# Altium PCB 把手锁主板20429.PcbDoc (part 2 of 2)
Units mil, origin at the board's own origin, x right, y up, seen from the top; angles counter-clockwise.
Board outline 5950 x 1025 mil, 2 copper layers (Top Layer, Bottom Layer); 74 components, 56 nets, 241 pads, 365 vias.
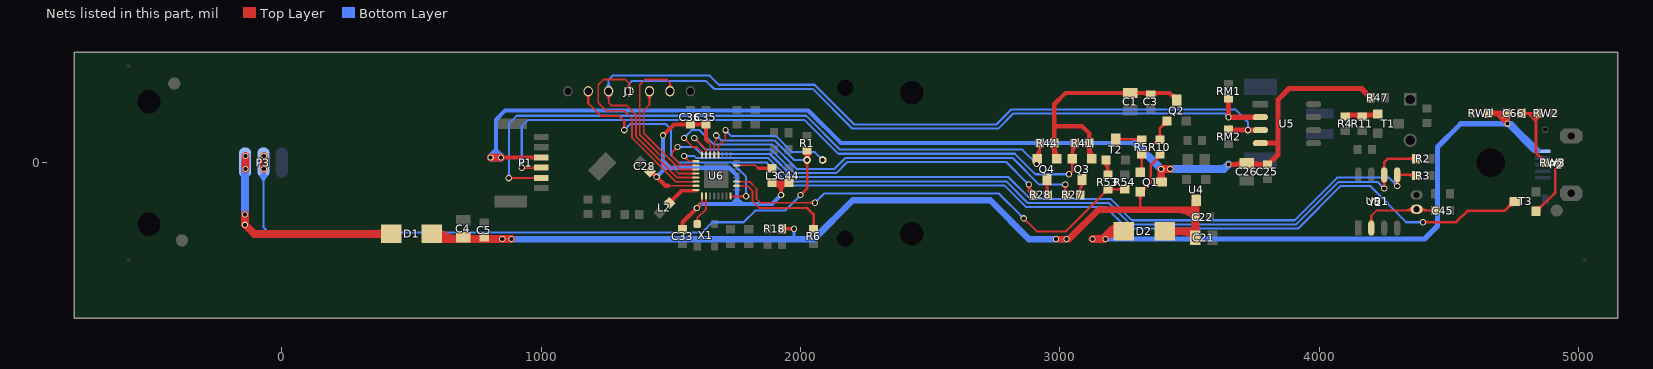
[diagram p2: the nets of this part, all layers, seen from the top]

## Via types
v1: diameter 24, hole 16, Top Layer to Bottom Layer, tented both sides, 363 vias
v2: diameter 20, hole 10, Top Layer to Bottom Layer, tented both sides, 2 vias

## Nets (pads, with @x,y where several pads share a name; then routed paths per layer and width w, separated by ;. In a path a pad name is that pad's centre, name@x,y a point inside that pad or via, vN(x,y) a via of type N, cw(c..) or ccw(c..) an arc to the next point about the centre after c; other vN are vias at no path point) (continued)
NetC45_2: C45.2 UB1.2 Y2.2 | length 528.7
  Top Layer w8: UB1.2@4194.48,-229.12 ccw(c4181.14,-215.79) 4200,-215.79 ccw(c4218.86,-215.79) UB1.2@4205.52,-229.12 ; UB1.2@4200,-252.36 4200,-205 4220,-185 C45.2@4447,-185 ; 4324.2,-185 ccw(c4324.2,-135.22) Y2.2@4359.4,-170.42 ; 4343.51,-185 ccw(c4343.51,-154.54) Y2.2@4365.05,-176.08 ; 4347.76,-185 cw(c4347.76,-201.45) Y2.2@4359.4,-189.82 ; Y2.2@4384.95,-176.08 ccw(c4406.49,-154.54) 4406.49,-185 ; Y2.2@4390.6,-189.82 cw(c4402.24,-201.45) 4402.24,-185 ; Y2.2@4390.6,-170.42 ccw(c4425.8,-135.22) 4425.8,-185 ; C45.2@4438.69,-193.31 ccw(c4418.64,-213.36) 4418.64,-185 ccw(c4418.64,-156.64) C45.2@4438.69,-176.69
NetC49_1: 
NetC66_2: C66.2 RW2.2 RW3.2 | length 490.4
  Top Layer w10: C66.2@4778,190 4803.95,190 ; C66.2@4785.6,182.4 cw(c4803.95,164.05) 4803.95,190 ; C66.2@4785.6,197.6 ccw(c4803.95,215.95) 4803.95,190 ; 4835,156.57 cw(c4857.38,156.57) RW2.2@4850.37,177.82 ; 4835,170.4 cw(c4852.82,170.4) RW2.2@4847.23,187.32 ; RW2.2@4835,189.52 4835,158.95 ; RW2.2@4839.4,182.4 ccw(c4821.05,164.05) 4821.05,190 ccw(c4821.05,215.95) RW2.2@4839.4,197.6 ; RW2.2@4847,190 4803.95,190 ; 4850.29,21.71 ccw(c4872,43.42) RW3.2@4872,12.72 ; 4855.04,16.96 cw(c4840.06,1.97) RW3.2@4861.25,1.97 ; RW3.2@4872,0 4835,37 4835,158.95 ; 4803.95,190 4835,158.95
NetD1_1: D1.1 P3.3 | length 1066.7
  Top Layer w30: v1(-141.73,-200) v1(-141.73,-240) -106.73,-275 ; v1(-140,-25) v1(-140,25) ; -25,-275 -106.73,-275 ; D1.1@402.87,-289.45 ccw(c367.99,-324.33) 367.99,-275 ccw(c367.99,-225.67) D1.1@402.87,-260.55 ; D1.1@421.26,-275 -106.73,-275
  Bottom Layer w30: v1(-141.73,-240) v1(-141.73,-200) P3.3@-141.73,0
NetL2_2: L2.2 U6.32 | length 156.7
  Top Layer w14: L2.2@1494.8,-155.2 1540.7,-109.3 1599.3,-109.3 ; L2.2@1494.8,-146.45 ccw(c1494.8,-125.33) 1509.73,-140.27 ccw(c1524.67,-155.2) L2.2@1503.55,-155.2
NetL3_2: L3.2 U6.15 | length 177.9
  Top Layer w7: U6.15@1753.74,-10.63 1825,-10.63 1836.37,-22
  Top Layer w12: 1836.37,-22 L3.2@1890,-22 ; L3.2@1881.14,-28.89 ccw(c1864.5,-45.53) 1864.5,-22 ccw(c1864.5,1.53) L3.2@1881.14,-15.11
NetQ1_G: Q1.G Q2.G R5.1 R10.2 | length 527.8
  Top Layer w8: Q1.G@3310,-37.6 3315,-32.6 Q1.G@3322,-25.6 ; R5.1@3315,18 3322,25 3322,32 R5.1@3322,37
  Top Layer w10: R5.1@3307.38,22.62 cw(c3288.98,4.22) 3315,4.22 ; Q1.G@3307.42,-28.29 ccw(c3289.13,-10) 3315,-10 ; Q1.G@3307.88,-35.48 ccw(c3290.69,-18.28) 3315,-18.28 ccw(c3329.31,-18.28) Q1.G@3319.19,-28.41 ; Q1.G@3315,-32.6 R5.1@3315,18 ; 3315,-9.89 ccw(c3341.02,-9.89) Q1.G@3322.62,-28.29 ; R5.1@3315,32 3322,32 3378,88 R10.2@3385,88 ; R5.1@3316.65,37.4 ccw(c3316.65,63.35) 3335,45 ccw(c3353.35,26.65) R5.1@3327.4,26.65 ; R5.1@3322.53,22.5 ccw(c3340.71,4.33) 3315,4.33 cw(c3340.87,4.33) R5.1@3322.58,22.62 ; 3365,75 cw(c3374.76,65.24) R10.2@3374.76,79.04 ; R10.2@3377.42,97.91 ccw(c3359.13,116.2) 3385,116.2 ; R10.2@3385,100 3385,132.4 Q2.G@3412.6,160 ; 3385,116.31 ccw(c3411.02,116.31) R10.2@3392.62,97.91 ; Q2.G@3399.6,160 cw(c3368.21,160) 3390.41,137.81 cw(c3412.6,115.62) Q2.G@3412.6,147
NetR4_1: R4.1 R11.1 T1.1 | length 726.8
  Top Layer w10: R4.1@4102.5,177.47 cw(c4126.47,153.5) 4126.47,187.4 ; R4.1@4109.57,185.6 ccw(c4127.92,203.95) 4127.92,178 ccw(c4127.92,152.05) 4109.57,170.4 cw(c4150.61,129.35) R11.1@4150.61,187.4 ; R4.1@4114.39,187.4 cw(c4114.39,129.35) 4155.43,170.4 ccw(c4137.08,152.05) 4137.08,178 ccw(c4137.08,203.95) R11.1@4155.43,185.6 ; 4138.53,187.4 cw(c4138.53,153.5) R11.1@4162.5,177.47 ; R11.1@4167.5,177.47 cw(c4191.47,153.5) 4191.47,187.4 ; R11.1@4170.92,178 ccw(c4170.92,241.49) 4215.81,196.59 cw(c4193.62,218.79) 4193.62,187.4 cw(c4193.62,156.02) T1.1@4215.81,178.21 ; R11.1@4174.57,185.6 ccw(c4192.92,203.95) 4192.92,178 ccw(c4192.92,152.05) 4174.57,170.4 cw(c4215.61,129.35) T1.1@4215.61,187.4 ; 4195.06,178 ccw(c4195.06,217.34) T1.1@4222.88,189.52 ; R4.1@4100,178 4109.4,187.4 T1.1@4225,187.4 4215.6,178 R11.1@4165,178 R4.1@4100,178
NetR5_2: R5.2 T2.3 | length 245.4
  Top Layer w8: T2.3@3215,90 R5.2@3322,90 ; T2.3@3224.9,80.1 cw(c3248.8,56.2) 3248.8,90 cw(c3248.8,123.8) T2.3@3224.9,99.9 ; 3284.89,90 ccw(c3284.89,116.02) R5.2@3303.29,97.62 ; 3285,90 cw(c3285,64.13) R5.2@3303.29,82.42 ; R5.2@3313.69,81.69 ccw(c3293.64,61.64) 3293.64,90 ccw(c3293.64,118.36) R5.2@3313.69,98.31
NetR27_2: R27.2 U6.24 | length 1917.6
  Top Layer w7: v1@1550,86.5 cw(c1550,65.98) 1564.51,80.49 cw(c1579.02,95) v1@1558.5,95 ; v1(1550,95) 1585,60 1600,60 1619.88,40.12 U6.24@1619.88,28.74
  Top Layer w8: R27.2@3013.69,-114.72 ccw(c2998.47,-99.5) 3020,-99.5 ; v1@3014.34,-90.66 cw(c3000.69,-104.31) 3020,-104.31 cw(c3039.31,-104.31) v1@3025.66,-90.66 ; v1@3020,-89.84 ccw(c3055.19,-89.84) R27.2@3030.31,-114.72 ; v1(3020,-85) 3020,-123 R27.2@3022,-125
  Bottom Layer w8: v1(1550,95) 1580,125 1610,125 1665,70 1890,70 1984.63,-24.63 2130.37,-24.63 2173.25,18.25 2816.75,18.25 2920,-85 v1(3020,-85) ; v1@1550,103 ccw(c1550,122.31) 1563.66,108.66 ccw(c1577.31,95) v1@1558,95 ; v1@3014.34,-90.66 ccw(c3000.69,-104.31) 3000.69,-85 ccw(c3000.69,-65.69) v1@3014.34,-79.34
NetR28_2: R28.2 U6.23 | length 1749.2
  Top Layer w7: v1@1590,86.5 cw(c1590,65.98) 1604.51,80.49 cw(c1619.02,95) v1@1598.5,95 ; v1(1590,95) 1635.63,49.37 U6.23@1635.63,28.74
  Top Layer w10: v1@2875.05,-89.95 cw(c2863.1,-101.9) 2880,-101.9 cw(c2896.9,-101.9) v1@2884.95,-89.95 ; 2880,-98.71 ccw(c2904.8,-98.71) R28.2@2897.23,-122.32 ; R28.2@2886.26,-122.56 ccw(c2868.2,-121.77) 2880.98,-108.98 ccw(c2890.84,-99.13) R28.2@2894.32,-112.62 ; R28.2@2897,-125 2880,-108 v1(2880,-85) ccw(c2909.19,-85) R28.2@2900.28,-112.8
  Bottom Layer w8: v1@1590,87 cw(c1590,67.69) 1603.66,81.34 cw(c1617.31,95) v1@1598,95 ; v1(1590,95) 1635,50 1887.55,50 1978.05,-40.5 2136.95,-40.5 2179.83,2.38 2792.62,2.38 v1(2880,-85) ; v1@2872,-85 ccw(c2852.69,-85) 2866.34,-71.34 ccw(c2880,-57.69) v1@2880,-77
NetR53_2: R53.2 T2.1 | length 170.9
  Top Layer w10: T2.1@3168.41,0.81 cw(c3128.34,-39.25) R53.2@3185,-39.25 ; T2.1@3175.48,7.88 cw(c3152.49,-15.11) 3185,-15.11 ; R53.2@3177.4,-39.4 ccw(c3159.05,-21.05) 3185,-21.05 ccw(c3210.95,-21.05) R53.2@3192.6,-39.4 ; T2.1@3177.6,10 3185,2.6 R53.2@3185,-47
NetRW3_1: RW3.1 T3.1 | length 307.1
  Top Layer w10: T3.1@4835,-187.4 4837.6,-187.4 4910,-115 4910,-25 4928,-7 RW3.1@4928,0 ; T3.1@4835,-174.4 ccw(c4835,-136.75) 4861.63,-163.37 ; T3.1@4848,-187.4 cw(c4873.11,-187.4) 4855.36,-169.64 ; 4912.52,-22.48 ccw(c4899.05,-9.01) RW3.1@4917.56,-4.51 ; RW3.1@4918.24,-16.76 cw(c4928,-26.52) RW3.1@4928,-12.72
NetU6_2: U6.2 X1.1 | length 158.3
  Top Layer w6: X1.1@1595.47,-237.6 X1.1@1595.47,-231.69
  Top Layer w7: X1.1@1595.15,-226.67 ccw(c1584.69,-213.47) 1601.54,-213.47 ; X1.1@1601.54,-236.69 1601.54,-213.46 ; X1.1@1607.92,-226.67 cw(c1618.38,-213.47) 1601.54,-213.47 ; U6.2@1635.63,-128.74 1635.63,-179.37 1601.54,-213.46
P04/LED_RED: J1.3 U6.27 | length 484.2
  Top Layer w7: J1.3@1407.47,262.98 cw(c1383.2,238.71) 1417.52,238.71 cw(c1451.84,238.71) J1.3@1427.57,262.98 ; J1.3@1417.52,275 1417.52,222.52 1395,200 1395,113.1 1534.48,-26.38 U6.27@1596.26,-26.38
P05/LED_GREEN: J1.2 U6.28 | length 681.7
  Top Layer w7: J1.2@1486.79,287.57 ccw(c1467.87,308.74) 1496.26,308.74 ; J1.2@1496.26,275 1496.26,308.74 ; J1.2@1505.73,287.57 cw(c1524.65,308.74) 1496.26,308.74 ; U6.28@1596.26,-42.13 1529.2,-42.13 1380,107.07 1380,300 1400,320 1485,320 1496.26,308.74
P06/MOTO1: J1.5 RM2.2 U5.3 U6.29 | length 3493.5
  Top Layer w7: J1.5@1249.99,262.98 cw(c1225.72,238.71) 1260.04,238.71 cw(c1294.36,238.71) J1.5@1270.09,262.98 ; J1.5@1260.04,275 1260.04,229.96 1270,220 1330,220 1365,185 1365,101.03 1523.91,-57.87 U6.29@1596.26,-57.87
  Top Layer w20: RM2.2@3653,125 v1(3725,125) U5.3@3772.64,125 ; RM2.2@3656.03,132.06 ccw(c3673.09,149.12) 3673.09,125
  Bottom Layer w8: J1.5@1250.34,286.67 ccw(c1226.92,310.08) 1260.04,310.08 ccw(c1293.15,310.08) J1.5@1269.74,286.67 ; J1.5@1260.04,275 1260.04,320.04 1275,335 1650,335 1685,300 2053.56,300 2206.81,146.75 2754.68,146.75 2812.93,205 3675,205 3725,155 v1(3725,125) ; v1@3719.34,130.66 ccw(c3705.69,144.31) 3725,144.31 ccw(c3744.31,144.31) v1@3730.66,130.66
P07/MOTO0: J1.4 RM1.2 U5.2 U6.30 | length 3534
  Top Layer w7: J1.4@1330,288.15 ccw(c1315.8,306.22) 1338.78,306.22 ccw(c1361.76,306.22) J1.4@1347.56,288.15 ; J1.4@1338.78,275 1338.78,306.22 1325,320 1240,320 1220,300 1220,230 1250,200 1320,200 1350,170 1350,95 1518.62,-73.62 U6.30@1596.26,-73.62
  Top Layer w20: RM1.2@3650,247 v1(3650,175) U5.2@3772.64,175
  Bottom Layer w8: J1.4@1330.75,288.09 ccw(c1319.44,303.78) 1338.78,303.78 ; J1.4@1338.78,275 1338.78,303.78 ; J1.4@1346.8,288.09 cw(c1358.12,303.78) 1338.78,303.78 ; v1@3642,175 ccw(c3622.69,175) 3636.34,188.66 ccw(c3650,202.31) v1@3650,183 ; v1(3650,175) 3635.87,189.13 2819.51,189.13 2761.26,130.87 2200.23,130.87 2047.11,284 1666,284 1635,315 1350,315 1338.78,303.78
PWR_CTL: R53.1 R54.2 U6.11 | length 1952
  Top Layer w7: U6.11@1753.74,-73.62 1803.62,-73.62 1830,-100 1830,-140 1845,-155 v1(2055,-155) ; v1@2048.99,-161.01 ccw(c2034.48,-175.52) 2034.48,-155 ccw(c2034.48,-134.48) v1@2048.99,-148.99
  Top Layer w8: v1@2859.34,-222.34 cw(c2859.34,-241.66) 2873,-228 cw(c2886.66,-214.34) v1@2867.34,-214.34 ; v1(2860,-215) 2910,-265 3023,-265 R53.1@3185,-103 R54.2@3250,-103 ; 3161.58,-126.42 ccw(c3138.17,-103) R53.1@3171.28,-103 ; 3166.34,-121.66 cw(c3183.03,-138.36) R53.1@3183.03,-114.75 ; R53.1@3195.28,-111.31 cw(c3215.33,-131.36) 3215.33,-103 cw(c3215.33,-74.64) R53.1@3195.28,-94.69 ; R54.2@3239.72,-111.31 ccw(c3219.67,-131.36) 3219.67,-103 ccw(c3219.67,-74.64) R54.2@3239.72,-94.69
  Bottom Layer w8: v1(2055,-155) 2090,-120 2765,-120 v1(2860,-215) ; v1@2055,-147 ccw(c2055,-127.69) 2068.66,-141.34 ccw(c2082.31,-155) v1@2063,-155 ; v1@2852,-215 ccw(c2832.69,-215) 2846.34,-201.34 ccw(c2860,-187.69) v1@2860,-207
REMOTO: R6.2 U6.10 | length 463.3
  Top Layer w7: U6.10@1753.74,-89.37 1794.37,-89.37 1815,-110 1815,-150 1840,-175 2025,-175
  Top Layer w10: 2025,-175 2050,-200 R6.2@2050,-257 ; R6.2@2042.4,-249.4 ccw(c2024.05,-231.05) 2050,-231.05 ccw(c2075.95,-231.05) R6.2@2057.6,-249.4
RSTN: J1.6 T3.3 U6.8 | length 4648.1
  Top Layer w8: J1.6@1171.6,263.33 cw(c1148.18,239.92) 1181.3,239.92 cw(c1214.41,239.92) J1.6@1191,263.33 ; J1.6@1181.3,275 1181.3,228.7 1230,180 1300,180 1320,160 v1(1320,125) ; v1@1314.34,130.66 ccw(c1300.69,144.31) 1320,144.31 ccw(c1339.31,144.31) v1@1325.66,130.66 ; U6.8@1730.18,-128.74 1731.44,-130 v1(1790,-130) ; v1@1784.34,-135.66 ccw(c1770.69,-149.31) 1770.69,-130 ccw(c1770.69,-110.69) v1@1784.34,-124.34
  Top Layer w10: v1(4400,-230) 4527.44,-230 4572.44,-185 4715,-185 4750,-150 T3.3@4755,-150 ; v1@4404.95,-234.95 cw(c4416.9,-246.9) 4416.9,-230 cw(c4416.9,-213.1) v1@4404.95,-225.05 ; 4726.86,-173.14 cw(c4751.35,-197.64) T3.3@4751.35,-163 ; 4730.11,-169.89 ccw(c4710.21,-150) T3.3@4738.35,-150
  Bottom Layer w8: v1(1320,125) 1343.87,148.87 1480,148.87 1500,128.87 1500,30 1530,0 1735,0 ; v1@1320,133 ccw(c1320,152.31) 1333.66,138.66 ccw(c1347.31,125) v1@1328,125 ; v1@1784.34,-124.34 ccw(c1770.69,-110.69) 1790,-110.69 ccw(c1809.31,-110.69) v1@1795.66,-124.34 ; v1(1790,-130) 1790,-88 ; 1790.13,-88.13 1790,-88 ; 1811,0 1800,0 ; 2000,-88.13 1958.13,-88.13 ; v1@4394.34,-235.66 ccw(c4380.69,-249.31) 4380.69,-230 ccw(c4380.69,-210.69) v1@4394.34,-224.34 ; v1(4400,-230) 4335,-230 4195,-90 4082.55,-90 3918.42,-254.13 3259.13,-254.13 3177,-172 2869.45,-172 2785.58,-88.13 1958.13,-88.13 ; 1735,0 1745,-10 ; 1735,0 1745,0 ; 1745,-10 1750,-15 ; 1745,-10 1745,0 ; 1745,0 1750,0 ; 1750,-15 1790,-55 1790,-88 ; 1750,-15 1750,0 ; 1750,0 1800,0 ; 1800,0 1870,0 1958.13,-88.13
RX2/SETKEY: P3.2 pad.2@2025,10 R1.1 U6.21 | length 3621.3
  Top Layer w6: U6.21@1667.13,28.74 1667.13,77.13 1675,85 ; v1@1669.03,98.26 cw(c1657.28,85) 1675,85 ; v1(1675,105) 1675,85 ; v1@1680.97,98.26 ccw(c1692.72,85) 1675,85
  Top Layer w10: v1(2000,-125) 2025,-100 pad.2@2025,10 ; v1@2000,-118 ccw(c2000,-101.1) 2011.95,-113.05 ccw(c2023.9,-125) v1@2007,-125 ; R1.1@2013,35 pad.2@2025,23 ; R1.1@2017.84,38.98 cw(c2003.58,23) pad.2@2025,23 ; pad.2@2017.93,2.93 cw(c2000.86,-14.14) 2025,-14.14 cw(c2049.14,-14.14) pad.2@2032.07,2.93 ; pad.2@2017.93,17.07 ccw(c2000.86,34.14) 2025,34.14 ccw(c2049.14,34.14) pad.2@2032.07,17.07 ; 2019.53,28.47 cw(c2005.25,14.2) pad.2@2025,10 ; R1.1@2025,47 pad.2@2025,23 ; 2027.36,25.36 ccw(c2036.65,16.07) pad.2@2025,10 ; R1.1@2032.16,38.98 ccw(c2046.42,23) pad.2@2025,23 ; pad.2@2033.87,14.62 cw(c2049.32,22.68) 2037,35 pad.2@2025,23 ; pad.2@2025,10 pad.2@2025,23
  Top Layer w30: v1(-70,-25) v1(-70,25)
  Bottom Layer w8: P3.2@-84.74,-49.31 cw(c-118.24,-82.8) -70.87,-82.8 cw(c-23.49,-82.8) P3.2@-56.99,-49.31 ; P3.2@-79.08,-43.65 cw(c-98.92,-63.49) -70.87,-63.49 cw(c-42.81,-63.49) P3.2@-62.65,-43.65 ; P3.2@-75.66,-30.66 cw(c-87.22,-42.22) P3.2@-70.87,-42.22 ; P3.2@-75.66,-19.34 ccw(c-87.22,-7.78) P3.2@-70.87,-7.78 ; P3.2@-70.87,-46.4 cw(c-48.6,-46.4) P3.2@-64.34,-30.66 ; P3.2@-70.87,-3.6 ccw(c-48.6,-3.6) P3.2@-64.34,-19.34 ; P3.2@-70.87,0 -70.87,-249.13 -50,-270 1620,-270 1660,-230 1780,-230 1825,-185 1940,-185 v1(2000,-125) ; v1@1675,97 cw(c1675,77.69) 1688.66,91.34 cw(c1702.31,105) v1@1683,105 ; v1(1675,105) 1694.13,85.87 1899.13,85.87 1975,10 pad.2@2025,10 ; v1@1992,-125 cw(c1972.69,-125) 1986.34,-138.66 cw(c2000,-152.31) v1@2000,-133 ; pad.2@2019.34,4.34 ccw(c2005.69,-9.31) 2005.69,10 ccw(c2005.69,29.31) pad.2@2019.34,15.66
SCL: R2.2 U6.25 UB1.6 | length 3384.2
  Top Layer w6: v1@1550,16 cw(c1550,-5.73) 1565.36,9.64 cw(c1580.73,25) v1@1559,25 ; v1(1550,25) 1569.88,5.12 U6.25@1596.26,5.12
  Top Layer w10: v1@4245.05,-95.05 ccw(c4233.1,-83.1) 4250,-83.1 ccw(c4266.9,-83.1) v1@4254.95,-95.05 ; UB1.6@4245.18,-70.17 cw(c4233.56,-81.8) 4250,-81.8 cw(c4266.44,-81.8) UB1.6@4254.82,-70.17 ; UB1.6@4245.18,-25.11 ccw(c4233.56,-13.48) 4250,-13.48 ccw(c4266.44,-13.48) UB1.6@4254.82,-25.11 ; v1(4250,-100) UB1.6@4250,-47.64 4250,0 4265,15 R2.2@4372,15 ; R2.2@4364.4,7.4 ccw(c4346.05,-10.95) 4346.05,15 ccw(c4346.05,40.95) R2.2@4364.4,22.6
  Bottom Layer w8: v1(1550,25) 1590,25 1597.87,17.13 1875.53,17.13 1964.9,-72.25 2792.15,-72.25 2875.77,-155.87 3188.42,-155.87 3270.8,-238.25 3911,-238.25 4075.13,-74.13 4224.13,-74.13 v1(4250,-100) ; v1@1555.66,19.34 cw(c1569.31,5.69) 1569.31,25 cw(c1569.31,44.31) v1@1555.66,30.66 ; v1@4242,-100 ccw(c4222.69,-100) 4236.34,-86.34 ccw(c4250,-72.69) v1@4250,-92
SDA: R3.2 U6.26 UB1.5 | length 3598.7
  Top Layer w7: v1@1516.5,60 cw(c1495.98,60) 1510.49,45.49 cw(c1525,30.98) v1@1525,51.5 ; v1(1525,60) 1505,40 1505,24.14 1539.77,-10.63 U6.26@1596.26,-10.63
  Top Layer w10: v1@4295.05,-85.05 ccw(c4283.1,-73.1) 4300,-73.1 ccw(c4316.9,-73.1) v1@4304.95,-85.05 ; UB1.5@4295.18,-70.17 cw(c4283.56,-81.8) 4300,-81.8 cw(c4316.44,-81.8) UB1.5@4304.82,-70.17 ; v1(4300,-90) UB1.5@4300,-47.64 4369.64,-47.64 R3.2@4372,-50 ; UB1.5@4304.82,-52.45 cw(c4316.44,-64.08) 4316.44,-47.64 cw(c4316.44,-31.19) UB1.5@4304.82,-42.82 ; 4345.1,-47.64 cw(c4345.1,-74.93) R3.2@4364.4,-55.63 ; 4347,-47.64 ccw(c4347,-23.03) R3.2@4364.4,-40.43
  Bottom Layer w8: v1(1525,60) 1590,60 1617,33 1882.1,33 1971.48,-56.38 1976.38,-56.38 ; v1@1530.66,54.34 cw(c1544.31,40.69) 1544.31,60 cw(c1544.31,79.31) v1@1530.66,65.66 ; 2125,-56.38 1976.38,-56.38 ; v1@4292,-90 ccw(c4272.69,-90) 4286.34,-76.34 ccw(c4300,-62.69) v1@4300,-82 ; v1(4300,-90) 4268.25,-58.25 4068.55,-58.25 3904.42,-222.38 3277.38,-222.38 3195,-140 2885,-140 2801.38,-56.38 1976.38,-56.38
TX2: pad.0 U6.20 | length 624.9
  Top Layer w6: U6.20@1682.87,28.74 1682.87,62.87 1710,90 v1(1710,125) ; v1@1703.64,118.64 cw(c1688.27,103.27) 1710,103.27 cw(c1731.73,103.27) v1@1716.36,118.64
  Bottom Layer w8: v1@1710,117 cw(c1710,97.69) 1723.66,111.34 cw(c1737.31,125) v1@1718,125 ; v1(1710,125) 1733.25,101.75 1905.7,101.75 1967.45,40 2055,40 pad.0@2085,10 ; pad.0@2077,10 ccw(c2057.69,10) 2071.34,23.66 ccw(c2085,37.31) pad.0@2085,18
UART_RD: P1.5 Q4.S R44.1 | length 2900.5
  Top Layer w8: v1(875,-60) 999.06,-60 P1.5@1000,-59.06 ; v1@880.66,-65.66 cw(c894.31,-79.31) 894.31,-60 cw(c894.31,-40.69) v1@880.66,-54.34 ; 963.11,-60 ccw(c963.11,-37.92) P1.5@978.73,-53.53 ; 967.68,-60 cw(c967.68,-75.63) P1.5@978.73,-64.58
  Top Layer w10: Q4.S@2903.41,24.19 ccw(c2858.51,69.08) R44.1@2922,69.08 ; Q4.S@2905.05,-0.05 ccw(c2864.13,40.87) 2922,40.87 ; Q4.S@2907.6,20 Q4.S@2912.6,15 2910,12.4 v1(2910,-5) 2922,7 R44.1@2922,75 R44.1@2912.6,65.6 ; Q4.S@2910.48,17.12 ccw(c2882.66,44.94) 2922,44.94 ; v1@2912.12,-7.12 ccw(c2888.27,16.73) Q4.S@2922,16.73 ; R44.1@2914.4,65.43 cw(c2896.05,47.08) 2922,47.08 cw(c2947.95,47.08) R44.1@2929.6,65.43
  Bottom Layer w8: v1@869.34,-54.34 ccw(c855.69,-40.69) 875,-40.69 ccw(c894.31,-40.69) v1@880.66,-54.34 ; v1(875,-60) 875,150 905.62,180.62 2021.27,180.62 2151.89,50 2855,50 v1(2910,-5) ; v1@2902,-5 ccw(c2882.69,-5) 2896.34,8.66 ccw(c2910,22.31) v1@2910,3
UART_RD1: Q4.D R28.1 | length 151.3
  Top Layer w10: Q4.D@2940.81,-77.85 cw(c2918.62,-100.04) 2950,-100.04 cw(c2981.38,-100.04) Q4.D@2959.19,-77.85 ; R28.1@2945.4,-115.43 ccw(c2934.29,-104.33) 2950,-104.33 ; 2950,-89.84 ccw(c2986.19,-89.84) R28.1@2960.6,-115.43 ; Q4.D@2950,-65 2950,-122 R28.1@2953,-125
UART_TD: P1.4 Q3.S R41.1 | length 2889.4
  Top Layer w8: v1(925,-20) 999.69,-20 P1.4@1000,-19.69 ; v1@930.66,-25.66 cw(c944.31,-39.31) 944.31,-20 cw(c944.31,-0.69) v1@930.66,-14.34 ; 964.63,-20 ccw(c964.63,-0.07) P1.4@978.73,-14.16 ; 966.16,-20 cw(c966.16,-37.78) P1.4@978.73,-25.21
  Top Layer w10: v1(3035,-45) 3047.6,-32.4 Q3.S@3047.6,15 3047.6,65.6 R41.1@3057,75 ; v1@3035,-38 ccw(c3035,-21.1) 3046.95,-33.05 ccw(c3058.9,-45) v1@3042,-45 ; Q3.S@3038.41,5.81 cw(c3016.21,-16.38) 3047.6,-16.38 cw(c3078.98,-16.38) Q3.S@3056.79,5.81 ; Q3.S@3038.41,24.19 ccw(c3016.21,46.38) 3047.6,46.38 ccw(c3078.98,46.38) Q3.S@3056.79,24.19 ; Q3.S@3047.6,24.39 cw(c3105.65,24.39) R41.1@3064.6,65.43 ; 3047.6,48.53 cw(c3081.5,48.53) R41.1@3057.53,72.5
  Bottom Layer w8: v1@919.34,-14.34 ccw(c905.69,-0.69) 925,-0.69 ccw(c944.31,-0.69) v1@930.66,-14.34 ; v1(925,-20) 925,140 949.75,164.75 2014.7,164.75 2145.32,34.13 2825.87,34.13 2905,-45 v1(3035,-45) ; v1@3029.34,-50.66 ccw(c3015.69,-64.31) 3015.69,-45 ccw(c3015.69,-25.69) v1@3029.34,-39.34
UART_TD1: Q3.D R27.1 | length 248.1
  Top Layer w6: R27.1@3068.99,-114.02 ccw(c3047.22,-92.26) 3078,-92.26 ccw(c3108.78,-92.26) R27.1@3087.01,-114.02 ; R27.1@3073.23,-118.26 ccw(c3061.71,-106.74) 3078,-106.74 ccw(c3094.29,-106.74) R27.1@3082.77,-118.26 ; Q3.D@3074.39,-79.26 cw(c3065.69,-87.97) 3078,-87.97 ; R27.1@3078,-125 Q3.D@3078,-68 ; R27.1@3078,-121.77 cw(c3138.11,-121.77) Q3.D@3095.61,-79.26 ; 3078,-107.28 cw(c3123.63,-107.28) Q3.D@3091.36,-75.02 ; 3078,-92.8 cw(c3109.14,-92.8) Q3.D@3087.12,-70.77
V6V: C25.1 C26.1 P1.3 Q1.D R47.2 U5.4 | length 4415.6
  Top Layer w16: v1(845,20) 999.69,20 P1.3@1000,19.68
  Top Layer w20: v1(3650,-7) C25.1@3800,-7 3803,-7 3840,30 3840,75 ; 3675.79,-7 ccw(c3675.79,34.21) C26.1@3704.93,5.07 ; C26.1@3735.07,5.07 ccw(c3764.21,34.21) 3764.21,-7 ; U5.4@3772.64,75 3840,75 ; R47.2@4183.83,263.17 ccw(c4197,276.35) R47.2@4197,257.72 ; R47.2@4197,250 4162,285 3883,285 3840,242 3840,75
  Top Layer w30: v1(805,20) v1(845,20) ; Q1.D@3390,-75 v1(3390,-25) v1(3425,-25)
  Bottom Layer w16: 825,20 825,40 825,165 860.5,200.5 2029.5,200.5 2155,75 3290,75
  Bottom Layer w30: 3290,75 v1(3390,-25) v1(3425,-25) 3632,-25 v1(3650,-7) ; v1(805,20) 825,20 v1(845,20) 825,40 v1(805,20)
VBAT: C4.1 C5.1 C21.1 C22.1 D1.2 D2.2 Q1.S R10.1 R18.1 U4.3 | length 4383.6
  Top Layer w10: Q1.S@3300.81,-121.59 cw(c3278.62,-143.79) 3310,-143.79 cw(c3341.38,-143.79) Q1.S@3319.19,-121.59 ; 3310,-181 Q1.S@3310,-112.4 3314.6,-112.4 3350,-77 3350,-10 3378,18 R10.1@3378,25 ; Q1.S@3310,-99.4 ccw(c3310,-56.92) 3340.04,-86.96 ; Q1.S@3323,-112.4 cw(c3343.28,-112.4) 3328.94,-98.06 ; 3365,5 ccw(c3338.06,31.94) R10.1@3376.16,31.94 ; R10.1@3377.15,17.15 cw(c3386.91,7.39) R10.1@3386.91,21.19
  Top Layer w12: R18.1@1928,-255 v1(1975,-255) ; R18.1@1934.89,-261.89 cw(c1951.53,-278.53) 1951.53,-255 cw(c1951.53,-231.47) R18.1@1934.89,-248.11 ; v1@1970.76,-259.24 ccw(c1960.51,-269.49) 1960.51,-255 ccw(c1960.51,-240.51) v1@1970.76,-250.76
  Top Layer w25: v1(2985,-295) v1(3025,-295) 3035,-295 3149,-181 3310,-181 3521,-181 3522,-180 ; 3448.9,-181 cw(c3448.9,-281.13) C22.1@3519.7,-210.33
  Top Layer w30: D1.2@578.74,-275 598.74,-295 v1(850,-295) v1(885,-295) ; D1.2@597.13,-260.55 ccw(c680.29,-177.39) C4.1@680.29,-295 ; 663.03,-295 ccw(c663.03,-259.03) C4.1@688.46,-284.46 ; C4.1@711.54,-284.46 ccw(c736.97,-259.03) 736.97,-295 ; 759.33,-295 ccw(c759.33,-269.29) C5.1@777.5,-287.47 ; C5.1@782.5,-287.47 ccw(c800.67,-269.29) 800.67,-295 ; D2.2@3403.74,-265 3522,-265 C22.1@3522,-210 3522,-180 3522,-148 U4.3@3525,-145 ; D2.2@3422.13,-279.45 cw(c3457.01,-314.33) 3457.01,-265 cw(c3457.01,-215.67) D2.2@3422.13,-250.55 ; 3468.89,-265 cw(c3468.89,-335.11) C21.1@3518.46,-285.54
  Bottom Layer w12: v1@1970.76,-259.24 cw(c1960.51,-269.49) 1975,-269.49 cw(c1989.49,-269.49) v1@1979.24,-259.24 ; 1975,-295 v1(1975,-255)
  Bottom Layer w25: v1(850,-295) v1(885,-295) 1975,-295 2052.04,-295 2201.42,-145.63 2730.63,-145.63 2880,-295 v1(2985,-295) v1(3025,-295)
VBUS: C66.1 D2.1 P2.1 RW1.1 | length 2931.8
  Top Layer w20: RW1.1@4653,190 4685,190 ; C66.1@4717.94,183.97 cw(c4700.88,166.91) 4725,166.91 ; 4685,190 v1(4725,150) 4725,187 C66.1@4722,190 4685,190
  Top Layer w30: v1(3125,-295) 3165,-295 3195,-265 ; v1@3171.34,-288.66 cw(c3205.33,-322.65) D2.1@3231.29,-282.2 ; v1@3172,-295 cw(c3188.9,-295) 3176.95,-283.05 ; 3184.38,-275.62 cw(c3234.37,-325.61) D2.1@3243.57,-255.51 ; 3197.68,-262.32 cw(c3225.92,-290.56) D2.1@3247.49,-256.95 ; D2.1@3227.45,-279.01 ccw(c3195,-309.58) 3195,-265 ; D2.1@3227.45,-250.99 cw(c3195,-220.42) 3195,-265 ; D2.1@3246.26,-265 3195,-265
  Bottom Layer w20: v1(3125,-295) 3165,-295 4405,-295 4455,-245 4455,60 4545,150 v1(4725,150) ; v1@4725,148 cw(c4725,106.96) 4754.02,135.98 ; v1@4725.57,148.08 cw(c4731.84,126.84) 4747.5,142.5 ; P2.1@4845,47 P2.1@4843,47 ; v1(4725,150) 4828,47 P2.1@4843,47 ; v1(4725,150) 4740,150 P2.1@4843,47
  other v1: 3175,-295
VDD: C28.2 C33.2 C35.2 C36.2 C44.2 L3.1 U6.1 U6.22 U6.31 | length 2180.2
  Top Layer w6: 1643.19,81.81 1651.38,73.62 U6.22@1651.38,28.74
  Top Layer w7: 1490,-89.37 U6.31@1596.26,-89.37 ; v1@1600,-166.5 ccw(c1600,-145.98) 1614.51,-160.49 ccw(c1629.02,-175) v1@1608.5,-175 ; 1610,-165 1619.88,-155.12 U6.1@1619.88,-128.74
  Top Layer w16: C28.2@1420,-25 1420,-30 v1(1445,-55) 1479.37,-89.37 1490,-89.37 ; C28.2@1421.19,-41.16 cw(c1421.19,-65.21) v1@1438.2,-48.2 ; v1(1470,105) 1512,147 C36.2@1575,147 C35.2@1635,147 1635,90 1643.19,81.81 ; C33.2@1539.52,-251.52 ccw(c1526.29,-238.29) 1545,-238.29 ccw(c1563.71,-238.29) C33.2@1550.48,-251.52 ; C33.2@1545,-257 1545,-230 v1(1600,-175) 1610,-165 ; C36.2@1567.55,141.52 ccw(c1554.33,128.29) 1554.33,147 ccw(c1554.33,165.71) C36.2@1567.55,152.48 ; C36.2@1582.45,141.52 cw(c1595.67,128.29) 1595.67,147 cw(c1595.67,165.71) C36.2@1582.45,152.48 ; C35.2@1627.55,141.52 ccw(c1614.33,128.29) 1614.33,147 ccw(c1614.33,165.71) C35.2@1627.55,152.48 ; C35.2@1629.52,141.52 cw(c1616.29,128.29) 1635,128.29 cw(c1653.71,128.29) C35.2@1640.48,141.52 ; L3.1@1890,-78 L3.1@1903,-78 ; L3.1@1897.45,-83.48 cw(c1910.67,-96.71) 1910.67,-78 cw(c1910.67,-59.29) L3.1@1897.45,-72.52 ; v1(1925,-125) 1925,-100 ; C44.2@1947.55,-83.48 ccw(c1934.33,-96.71) 1934.33,-78 ccw(c1934.33,-59.29) C44.2@1947.55,-72.52 ; C44.2@1955,-78 C44.2@1947,-78 ; L3.1@1903,-78 1925,-78 ; L3.1@1903,-78 1925,-100 ; 1925,-100 C44.2@1947,-78 ; 1925,-100 1925,-78 ; 1925,-78 C44.2@1947,-78
  Bottom Layer w16: v1@1450,-50 1470,-30 ; 1470,35 1470,5 ; v1(1470,105) 1470,5 ; 1515,-20 1495,-20 ; v1(1600,-175) 1615,-160 1735,-160 ; v1(1925,-125) 1890,-160 1775,-160 ; 1470,-30 1470,-10 ; 1470,-30 1480,-20 ; 1470,-10 1470,5 ; 1470,-10 1480,-20 ; 1470,5 1495,-20 ; 1480,-20 1495,-20 ; 1495,-20 1725,-20 1755,-50 1755,-140 ; 1735,-160 1755,-140 ; 1735,-160 1755,-160 ; 1755,-160 1755,-140 ; 1755,-160 1775,-160 ; 1755,-140 1775,-160
VDD3V3: C1.1 C3.1 Q2.D Q3.G Q4.G R41.2 R44.2 | length 1353.8
  Top Layer w16: R44.2@2972.52,67.55 cw(c2959.29,54.33) 2978,54.33 cw(c2996.71,54.33) R44.2@2983.48,67.55 ; R44.2@2972.52,82.45 ccw(c2959.29,95.67) 2978,95.67 ccw(c2996.71,95.67) R44.2@2983.48,82.45 ; R44.2@2978,61.84 ccw(c3034.24,61.84) Q4.G@2994.47,22.07 ; Q4.G@2987.4,15 2978,24.4 R44.2@2978,75 2978,140 ; R41.2@3107.52,67.55 cw(c3094.29,54.33) 3113,54.33 cw(c3131.71,54.33) R41.2@3118.48,67.55 ; R41.2@3107.52,82.45 ccw(c3094.29,95.67) 3113,95.67 ccw(c3131.71,95.67) R41.2@3118.48,82.45 ; R41.2@3113,61.84 ccw(c3169.24,61.84) Q3.G@3129.47,22.07 ; Q3.G@3122.4,15 3113,24.4 R41.2@3113,75 3113,112 3085,140 2978,140 ; C1.1@3253.51,259.51 ccw(c3233.03,239.03) 3233.03,268 ccw(c3233.03,296.97) C1.1@3253.51,276.49 ; C1.1@3286.49,259.51 cw(c3306.97,239.03) 3306.97,268 cw(c3306.97,296.97) C1.1@3286.49,276.49 ; 3317.26,268 cw(c3317.26,232.22) C3.1@3342.55,257.52 ; C3.1@3357.45,257.52 cw(c3382.74,232.22) 3382.74,268 ; 3426.69,263.31 ccw(c3450,286.62) Q2.D@3450,253.65 ; Q2.D@3435.51,254.49 cw(c3424.68,243.65) Q2.D@3440,243.65 ; Q2.D@3450,240 3422,268 C1.1@3270,268 3021,268 2978,225 2978,140
VDD_SCL: 
VDD_SDA: 
pads on no net: P2.2 P2.3 P2.4 P2.6 P2.7 P2.8 P2.9 U5. U5.1 U6.9 U6.13 UB1. UB1.3 UB1.7 Y2.3

## Polygon pours and split planes (outlines as drawn)
GND on Top Layer "Top Layer-GND" (hatched 45Degree grid 9 track 11, remove dead copper, pour order 3): -600,-400 -600,400 5050,400 5050,-400 -600,-400
GND on Bottom Layer "Bottom Layer-GND" (hatched 45Degree grid 11 track 15, remove dead copper, pour order 4): -600,-400 -600,400 5050,400 5050,-400 -600,-400

## Keep-outs
Keep-Out Layer:
  lines w10: -590.55,-297.52 -590.55,-218.77 cw(c-511.81,-218.77) -518.37,-140.31 ccw(c-521.65,-101.08) -482.28,-101.08 -482.28,96.6 ccw(c-521.65,96.6) -518.37,135.83 cw(c-511.81,214.3) -590.55,214.3 -590.55,295.28 cw(c-511.81,295.28) -511.81,374.02 2488.76,374.02 cw(c2488.76,334.65) 2528.13,334.65 ; -590.55,-295.28 ccw(c-511.81,-295.28) -511.81,-374.02 2488.76,-374.03 ; 2488.76,-374.02 ccw(c2488.76,-334.65) 2528.13,-334.65 ; 2775.81,-334.65 ccw(c2815.18,-334.65) 2815.18,-374.02 4488.19,-374.02 ccw(c4488.19,-334.65) 4527.56,-334.65 4527.56,-326.77 cw(c4625.98,-326.77) 4625.98,-228.35 4940.94,-228.35 ccw(c4940.94,-145.67) 5023.62,-145.67 5023.62,145.67 ccw(c4940.94,145.67) 4940.94,228.35 4625.98,228.35 cw(c4625.98,326.77) 4527.56,326.77 4527.56,334.65 ccw(c4488.19,334.65) 4488.19,374.02 ; 2775.81,334.65 cw(c2815.18,334.65) 2815.18,374.02 4492.13,374.02 ; 2528.13,333.46 ccw(c2651.97,340.09) 2775.81,333.46 ; 2528.13,333.46 ccw(c2651.97,340.09) 2775.81,333.46 ; 2528.13,333.46 ccw(c2651.97,340.09) 2775.81,333.46 ; 2528.13,333.46 ccw(c2651.97,340.09) 2775.81,333.46 ; 2528.13,333.46 ccw(c2651.97,340.09) 2775.81,333.46 ; 47.24,-188.98 ccw(c86.61,-188.98) 86.61,-228.35 295.28,-228.35 ccw(c295.28,-188.98) 334.65,-188.98 cw(c374.02,-188.98) 374.02,-149.61 517.13,-149.61 ccw(c517.13,-110.24) 556.5,-110.24 556.5,110.24 ccw(c517.13,110.24) 517.13,149.61 374.02,149.61 cw(c374.02,188.98) 334.65,188.98 ccw(c295.28,188.98) 295.28,228.35 86.61,228.35 ccw(c86.61,188.98) 47.24,188.98 47.24,-188.98 ; 2528.13,-337.94 cw(c2651.97,-344.57) 2775.81,-337.94 ccw(c2651.97,-344.57) 2528.13,-337.94

## Other copper
Top Layer:
  rectangle net GND: 1600,-355 1634.57,-321.77
  region net GND: 3245.47,-0.83 3267.32,-22.68 3285,-5 3263.15,16.85
  rectangle net GND: 3250,-5 3285.43,50
  rectangle net GND: 3218.9,-65 3275,50.37
  rectangle net NetL2_2: 1494.8,-155.2 1515,-135
  rectangle net GND: 3530,-100 3601,125
  rectangle net GND: 3610,37 3698,90
  rectangle net GND: 3562,-343 3658,-159
  rectangle net GND: 4498,-178 4539,-85
  region net GND: 4848,-155 4855,-148 4841.3,-134.3 4834.3,-141.3
  rectangle net GND: 4797,-148 4855,-76
  rectangle net GND: 1358,-45 1380,-17
  rectangle net GND: 1397,5 1405,10
  rectangle net GND: 1338,-8 1361,16
  rectangle net GND: 1225,-151 1245,-108
  region net GND: 1232,-158 1241.19,-148.81 1234.19,-141.81 1225,-151
  rectangle net GND: 1232,-158 1315,-110
  region net GND: 1352.5,2.5 1382.5,32.5 1320,95 1290,65
  rectangle net GND: 1334.8,-40.2 1364.8,-10.2
  region net GND: 1363.8,-36.2 1405,5 1375,35 1333.8,-6.2
  region net GND: 1252.5,-142.5 1405,10 1382.5,32.5 1230,-120
  region net GND: 1270,-150 1270,-120 1230,-120 1230,-150
  rectangle net VBUS: 3145,-310 3200,-288.66
  rectangle net VBUS: 3190,-310 3290,-225
  rectangle net GND: 1048.03,230.95 1140,320
  rectangle net GND: 4190,17.28 4245,120
  rectangle net GND: 4130.59,90.6 4258,145.6
  rectangle net GND: 4280,-307.06 4340,-207.83
  region net GND: 1620,-340 1637.5,-322.5 1609.22,-294.22 1591.72,-311.72
  rectangle net GND: 1750,-280 1762.72,-274.55
  region net GND: 1754.55,-274.55 1771.21,-257.9 1750,-236.69 1733.35,-253.35
  rectangle net GND: 1685,-280 1750,-236.69
  rectangle net GND: 1767.28,-338.7 1837.37,-291.24
  rectangle net GND: 1915,-338.7 2097.7,-300
  rectangle net GND: 1520,189.53 1787.72,240
  rectangle net GND: 1485.21,-355 1620,-295
  rectangle net GND: 1650,-267.44 1697.24,-220
  rectangle net VBUS: 3200,-305 3290,-225
  rectangle net GND: 640,-225 1110.99,-85
  rectangle net GND: 775,120 965,185
  rectangle net GND: 3201.62,164.5 3385.22,230
  rectangle net GND: 4885,154.78 4942.14,210
  rectangle net NetC66_2: 4760,170 4865,210
  rectangle net GND: 1933.79,-40 1990.22,186.37
  region net GND: 1716.81,-44.57 1735,-26.38 1716.81,-8.19 1698.62,-26.38
  region net RSTN: 1737.5,-132.5 1742.5,-127.5 1732.5,-117.5 1727.5,-122.5
  region net RSTN: 1731.5,-141.5 1743,-130 1739,-126 1727.5,-137.5
  region net GND: 965,120 979.14,134.14 972.07,141.21 957.93,127.07
  rectangle net GND: 3700,-135 3850,-65
  region net VBUS: 3148.5,-304.5 3209,-244 3190,-225 3129.5,-285.5
  region net GND: 1315,-158 1323.91,-149.09 1318.25,-143.44 1309.34,-152.34
  pour cut-out: 955,120 955,-70 970,-85 1075,-85 1095,-65 1095,115 1075,140 975,140
  pour cut-out: 1615,-110 1615,-100 1605,-90 1485,-90 1425,-150 1235,-150 1225,-140 1225,-115 1335,-5 1335,15 1270,80 1230,80 1135,-15 1135,-225 1160,-250 1475,-250
  region net ANT: 1295,-5 1295,5 1255,45 1245,45 1165,-35 1165,-145 1170,-150 1190,-150 1195,-145 1195,-105
  region net VBAT: 3545,-125 3545,-320 3540,-325 3370,-325 3360,-315 3360,-205 3335,-180 3280,-180 3280,-170 3290,-160 3290,-90 3295,-85 3345,-85 3345,-140 3355,-150 3475,-150 3505,-120 3540,-120
  region net V6V: 3440,-15 3435,-10 3375,-10 3365,-20 3365,-95 3370,-100 3415,-100 3425,-90 3425,-55 3440,-40
  region net M3V3: 3465,175 3470,180 3505,180 3510,175 3510,-95 3500,-105 3470,-105 3455,-90 3455,70 3435,90 3435,120 3465,150
Bottom Layer:
  region net VBAT: 1975,-305 1992.76,-287.24 1975,-269.49 1957.24,-287.24
  rectangle net GND: 4830,-83.64 4860.63,-59.06
  region net MOTO+: 3980,180 4002.67,202.67 3975,230.34 3952.33,207.67
  region net MOTO-: 3975,69.66 4002.67,97.33 3978.54,121.46 3950.88,93.79
  rectangle net GND: 3692.34,241.47 3865,326.81
  rectangle net GND: 3689.23,-40 3875,75
  region net GND: 4812.5,-102.5 4847.5,-67.5 4835,-55 4800,-90
  region net GND: 4810,-115 4860,-65 4850,-55 4800,-105
  rectangle net GND: 1050,250.87 1145.97,325
  region net VBUS: 4856.16,38.84 4863.66,46.34 4820,90 4812.5,82.5
  rectangle net VBUS: 4800,80 4820,90
  pour cut-out: 1550,-175 1550,-150 1505,-105 1470,-105 1425,-150 1230,-150 1220,-140 1220,-105 1315,-10 1315,15 1270,60 1240,60 1135,-45 1135,-225 1150,-240 1485,-240
  pour cut-out: 50,-75 50,75 25,100 -165,100 -190,75 -190,-75 -165,-100 25,-100

## Silkscreen, mask and mechanical layers (free items; w line width, h text height)
Top Overlay:
  circle w20: c0,0 r342.52
  circle w10: c2427.56,269.41 r78.74
  circle w10: c2427.56,-273.9 r78.74
  circle w10: c2171.65,-293.58 r43.31
  circle w10: c2171.65,289.09 r43.31
  circle w10: c4657.87,0 r90.55
  circle w10: c-512.17,233.98 r78.74
  circle w10: c-512.17,-238.46 r78.74
  text "GND" at 1050,200 h30 r270
  text "RSN" at 1115,200 h30 r270
  text "P06" at 1175,200 h30 r270
  text "P07" at 1235,200 h30 r270
  text "P04" at 1300,200 h30 r270
  text "P05" at 1365,200 h30 r270
  text "3.3V" at 1425,200 h30 r270
  text "M3" at 1070,75 h36
  text "20-4-29" at 2095,55 h40
  text "IN" at 1070,25 h36
  text "6V" at 1070,-30 h36
  text "V1.0" at 2165,-40 h40
  text "T" at 1070,-80 h36
  text "RX" at 2070,-80 h30 r90
  text "TX" at 2115,-80 h30 r90
  text "JYD-BS" at 2100,-140 h40
  text "R" at 1070,-145 h36
  text "G" at 1070,-200 h36
Bottom Overlay:
  circle w10: c4661.42,0 r106.3
  rectangle: -175,75 30,355.64
  lines w10: -250,-389.76 -250,389.76 ; 209.37,-354.33 -210.63,-354.33 -210.63,354.33 210.63,354.33 210.63,-354.33 ; 250,-389.76 250,389.76
  text "+" at 4519,295.02 h40
  text "M+" at 4100,200 h30
  text "M-" at 4100,75 h30
  text "BAT" at -130,-100 h30 r90
  text "KEY" at -55,-100 h30 r90
  text "GND" at 15,-100 h30 r90
Mechanical 1:
  text "工艺要求:" at 1440,865 h100
  text "1> 板材:FR-4" at 1440,665 h50
  text "4> 阻焊:顶层绿油" at 2065,665 h50
  text "7> 板框: Keep-out 层" at 2740,665 h50
  text "2> 板厚:1.2   mm" at 1440,565 h50
  text "5> 阻焊:底层绿油" at 2065,565 h50
  text "3> 过孔:盖油" at 1440,465 h50
  text "6> 字符:白色双面" at 2065,465 h50

## Dimensions
-590.55,374.02 to -590.55,-374.02 on Mechanical 1
-590.55,-374.02 to 5023.62,-374.02 on Mechanical 1